# Altium PCB Connected_Cube.PcbDoc (part 4 of 4)
Units mil, origin at the board's own origin, x right, y up, seen from the top; angles counter-clockwise.
Board outline 4960.63 x 3700.79 mil, 4 copper layers (Top Layer, GND, Power, Bottom Layer), stack 47.164 mil thick; 209 components, 203 nets, 946 pads, 737 vias.
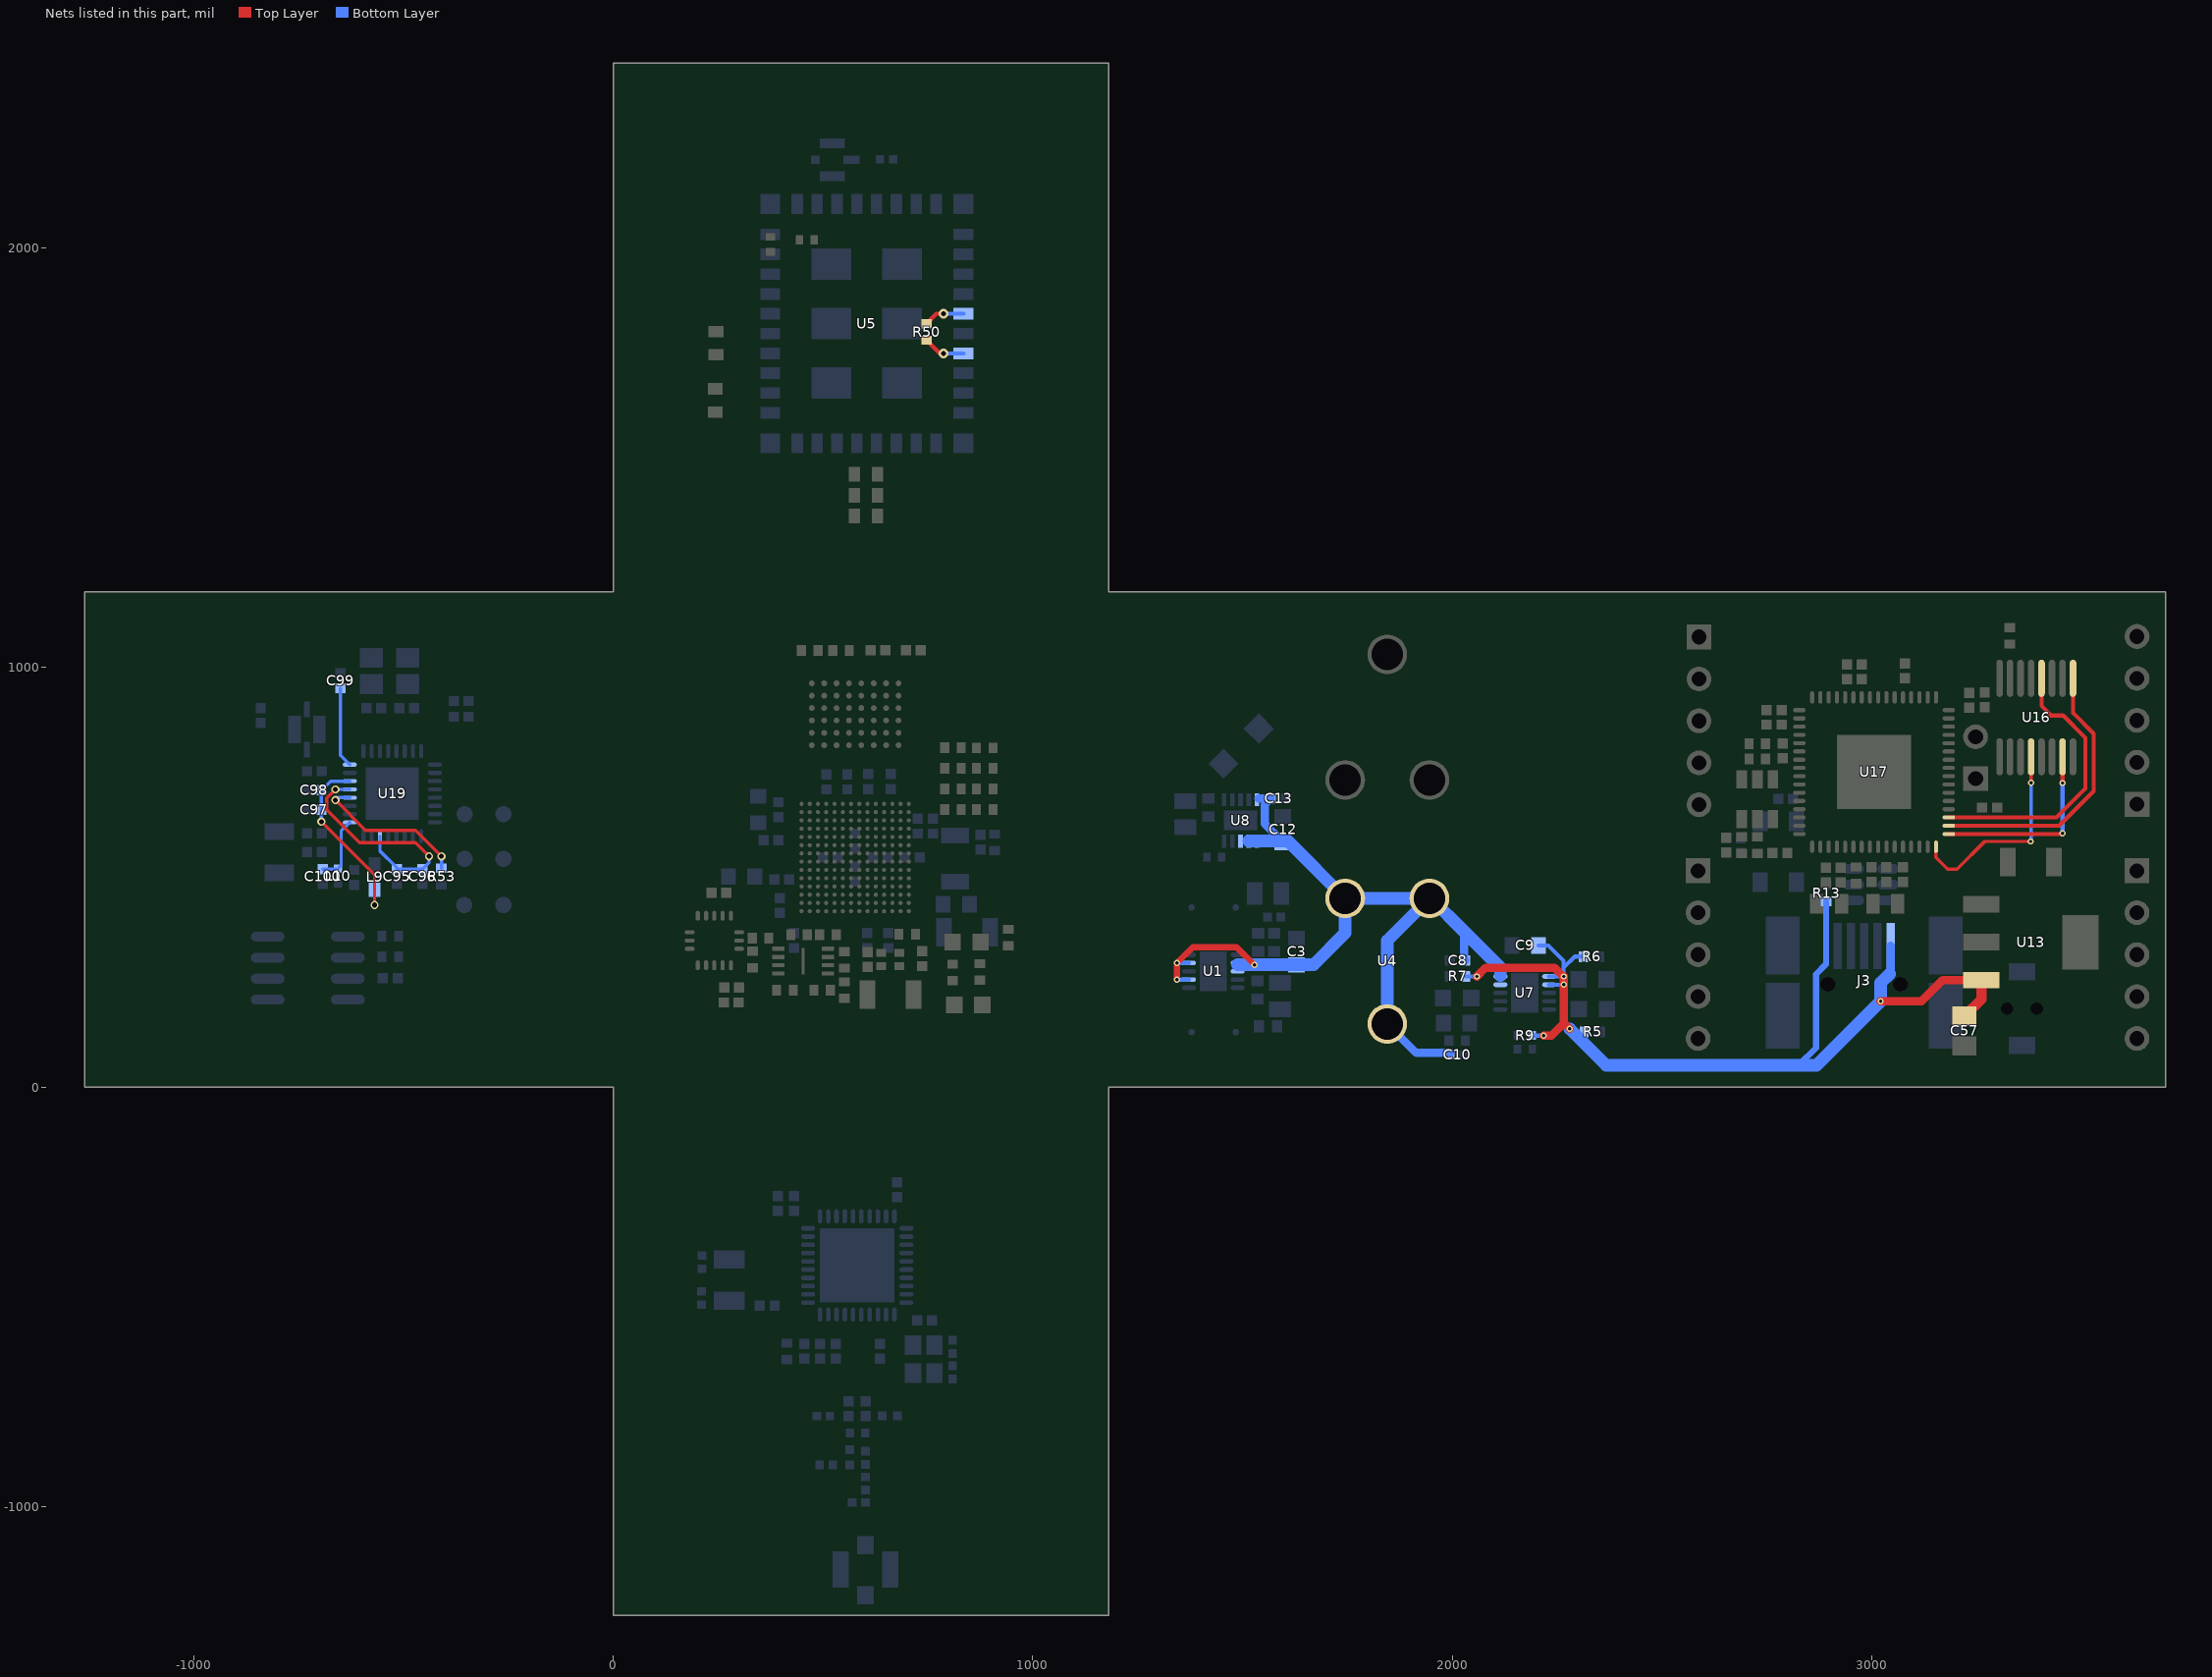
[diagram p6: the nets of this part, all layers, seen from the top]

## Via types
v1: diameter 15, hole 8, Top Layer to Bottom Layer, tented both sides, 313 vias
v2: diameter 19.68, hole 11.81, Top Layer to Bottom Layer, tented both sides, 269 vias
v3: diameter 11, hole 6, Top Layer to Bottom Layer, tented both sides, 78 vias
v4: diameter 23.62, hole 11.81, Top Layer to Bottom Layer, tented both sides, 37 vias
v5: diameter 19.68, hole 7.87, Top Layer to Bottom Layer, tented both sides, 35 vias
v6: diameter 15.75, hole 11.81, Top Layer to Bottom Layer, tented both sides, 5 vias

## Nets (pads, with @x,y where several pads share a name; then routed paths per layer and width w, separated by ;. In a path a pad name is that pad's centre, name@x,y a point inside that pad or via, vN(x,y) a via of type N, cw(c..) or ccw(c..) an arc to the next point about the centre after c; other vN are vias at no path point) (continued)
TCK: U16.4 U17.16 | length 492
  Top Layer w8: U17.16@3153.54,572.83 3153.54,547.24 3181.1,519.69 3203.74,519.69 3269.69,585.63 v1(3378.94,585.63) ; v1(3379.92,725.39) 3380.22,725.69 U16.4@3380.22,787.4
  Bottom Layer w8: v1(3378.94,585.63) 3379.92,586.61 v1(3379.92,725.39)
TDI: U16.7 U17.17 | length 451.3
  Top Layer w10: U17.17@3184.06,603.35 v1@3453.25,603.35 ; v1(3455.22,724.9) U16.7@3455.22,787.4
  Bottom Layer w10: v1(3455.22,605.32) v1(3455.22,724.9)
TDO: U16.9 U17.18 | length 668.8
  Top Layer w10: U17.18@3184.06,623.03 3446.85,623.03 3529.53,705.71 3529.53,842.52 3480.22,891.83 U16.9@3480.22,974.41
TMS: U16.12 U17.19 | length 677.4
  Top Layer w10: U17.19@3184.06,642.72 3440.95,642.72 3509.84,711.61 3509.84,832.68 3456.69,885.83 3427.85,885.83 3405.22,908.46 U16.12@3405.22,974.41
VBUS: C9.1 C57.2 J3.1 R5.2 R6.2 R7.2 R9.2 R13.1 U7.1 U7.2 U13.3 | length 2471.4
  Top Layer w20: v1(2059.06,263.78) 2079.72,284.45 2244.09,284.45 2264.76,263.78 v1(2265.75,263.78) 2265.75,153.54 ; v1(2218.5,123.03) 2237.2,123.03 2265.75,151.57 2265.75,153.54 ; v1(2280.51,138.78) 2265.75,153.54 ; v1(3021.65,204.72) 3119.09,204.72 3169.29,254.92 U13.3@3261.81,254.92
  Top Layer w25: C57.2@3221.46,169.29 3261.81,209.65 U13.3@3261.81,254.92
  Bottom Layer w10: R7.2@2032.48,263.78 v1(2059.06,263.78) ; R9.2@2190.95,123.03 v1(2218.5,123.03) ; C9.1@2205.71,337.6 2229.33,337.6 2265.75,301.18 2265.75,284.45 ; U7.2@2231.3,244.09 v1(2265.75,244.09) ; U7.1@2231.3,263.78 v1(2265.75,263.78) 2265.75,284.45 ; R6.2@2312.99,311.02 2292.32,311.02 2265.75,284.45
  Bottom Layer w15: 2825.79,52.17 2867.45,93.83 2867.45,269.03 2891.73,293.31 R13.1@2891.73,442.17
  Bottom Layer w20: 3045.27,269.84 J3.1@3045.27,336.61
  Bottom Layer w30: v1(2280.51,138.78) 2367.13,52.17 2825.79,52.17 2869.09,52.17 v1(3021.65,204.72) 3021.65,248.35 3043.15,269.84
VDD_BAT: C100.2 L10.2 U19.1 | length 158.9
  Bottom Layer w7.87: C100.2@-692.91,519.69 -657.48,519.69 L10.2@-656.5,520.67 -648.62,528.54 -648.62,610.24 U19.1@-627.95,630.91
VDD_CORE: C95.2 C96.2 U19.5 U19.30 | length 574.9
  Top Layer w7.87: v2(-662.4,709.65) -683.07,688.98 -683.07,661.42 -604.33,582.68 -471.46,582.68 v2(-438.98,550.2)
  Bottom Layer w7.87: v2(-662.4,709.65) U19.5@-627.95,709.65 ; U19.30@-556.1,598.42 -556.1,562.99 -515.75,522.64 C95.2@-515.75,519.69 C96.2@-454.72,519.69 -438.98,535.43 v2(-438.98,550.2)
VDD_REG_IN: C97.2 C98.2 L9.2 U19.6 | length 439.5
  Top Layer w7.87: v2(-695.87,632.87) -568.9,505.91 v2(-568.9,434.06)
  Bottom Layer w7.87: v2(-695.87,632.87) C97.2@-695.87,661.42 C98.2@-695.87,707.68 -674.21,729.33 U19.6@-627.95,729.33 ; v2(-568.9,434.06) L9.2@-568.9,470.47
VDD_XTAL: C99.2 U19.8 | length 191.5
  Bottom Layer w7.87: C99.2@-650.59,950.79 -650.59,791.34 U19.8@-627.95,768.7
VIN: C3.2 C8.1 C10.1 C12.2 C13.1 U1.2 U1.3 U1.7 U1.9 U4.1 U4.2 U4.3 U7.9 U7.10 U8.5 U8.6 U8.7 U8.8 | length 2211.9
  Top Layer w15: v1(1343.98,256.41) v1@1343.98,295.75 ; v1(1344.01,295.78) 1381.89,333.66 1486.22,333.66 v1(1528.54,291.34)
  Bottom Layer w10: v1(1343.98,256.41) U1.7@1372.56,256.41 ; v1(1344.01,295.78) U1.9@1372.56,295.78
  Bottom Layer w15: U8.6@1535.43,586.61 1574.8,586.61
  Bottom Layer w20: U8.5@1538.39,687.99 C13.1@1567.91,687.99 1553.15,673.23 1553.15,627.95 C12.2@1594.49,586.61 ; U4.3@1845.47,150.67 1914.6,81.54 C10.1@1996.06,81.54 ; 2028.54,371.06 2028.54,304.13 C8.1@2030.51,302.17
  Bottom Layer w30: U1.2@1488.7,291.96 1669.91,291.96 ; U8.7@1515.75,586.61 1594.49,586.61 1608.33,586.61 U4.1@1745.08,449.87 ; 1669.29,291.34 1669.91,291.96 ; U4.3@1845.47,150.67 1845.47,349.47 U4.2@1945.87,449.87 ; U7.10@2115.16,265.75 2115.16,284.45 2028.54,371.06 1949.74,449.87 U4.2@1945.87,449.87 ; 1669.91,291.96 1745.08,367.13 U4.1@1745.08,449.87 ; U4.1@1745.08,449.87 U4.2@1945.87,449.87
WAKE: R53.1 U19.4 | length 373.8
  Top Layer w7.87: v2(-662.4,684.06) -590.55,612.2 -471.46,612.2 v2(-409.45,550.2)
  Bottom Layer w7.87: v2(-662.4,684.06) -656.5,689.96 U19.4@-627.95,689.96 ; R53.1@-409.45,521.65 v2(-409.45,550.2)
WL_EN1: R50.2 U5.7 | length 100.6
  Top Layer w10: R50.2@747.05,1780.51 778.54,1749.02 v4(787.4,1749.02)
  Bottom Layer w10: v4(787.4,1749.02) U5.7@834.65,1749.02
WL_EN2: R50.1 U5.5 | length 97.4
  Top Layer w10: R50.1@747.05,1819.88 770.67,1843.5 v4(787.4,1843.5)
  Bottom Layer w10: v4(787.4,1843.5) U5.5@834.65,1843.5
pads on no net: J3.4 J3.X J3.Y SW5.MH1 SW5.MH2 U2.2 U2.3 U5.2 U5.3 U5.4 U5.24 U10.M12 U11.A6 U11.E3 U11.G2 U11.H1 U11.H6 U15.3 U15.4 U17.22 U17.23 U17.24 U17.26 U17.27 U17.28 U17.29 U17.30 U17.32 U17.33 U17.34 U17.36 U17.43 U17.44 U17.45 U17.46 U17.48 U17.52 U17.53 U17.54 U17.55 U17.57 U17.58 U17.59 U17.60 U19.11 U19.12 U19.13 U19.23 U19.24 U19.25 X2.4

## Polygon pours and split planes (outlines as drawn)
GND on GND "Power-No Net" (solid, pour order 40): 1263.78,1181.1 1263.78,0 2434.05,0 2434.05,1181.1 1263.78,1181.1
GND on GND "Power-No Net" (solid, pour order 47): 3.94,1174.21 3.94,3.94 1175.2,3.94 1175.2,1174.21 3.94,1174.21
GND on GND "Power-No Net" (solid, pour order 43): 2525.59,1181.1 2525.59,0 3700.79,0 3700.79,1181.1 2525.59,1181.1
GND on GND "Power-No Net" (solid, pour order 36): 0,-1259.84 1181.1,-1259.84 1181.1,-84.65 0,-84.65 0,-1259.84
GND on GND "GND" (solid, pour order 32): -933.07,1181.1 -84.65,1181.1 -84.65,0 -933.07,0 -933.07,1181.1
GND on GND "Power-No Net" (solid, pour order 28): 0,2440.95 1181.1,2440.95 1181.1,1263.78 0,1263.78 0,2440.95
GND on Power "Power-No Net" (solid, pour order 27): 0,2440.95 1181.1,2440.95 1181.1,1263.78 0,1263.78 0,2440.95
GND on Power "Power-No Net" (solid, pour order 35): 0,-1259.84 1181.1,-1259.84 1181.1,-84.65 0,-84.65 0,-1259.84
GND on Power "GND" (solid, pour order 31): -933.07,1181.1 -84.65,1181.1 -84.65,0 -933.07,0 -933.07,1181.1
3V3 on Power "Power-No Net" (solid, pour order 46): 3.94,1174.21 3.94,3.94 1175.2,3.94 1175.2,1174.21 3.94,1174.21
GND on Power "Power-No Net" (solid, pour order 39): 1263.78,1181.1 1263.78,0 2434.06,0 2434.06,1181.1 1263.78,1181.1
3V3_FT on Power "Power-No Net" (solid, pour order 48): 2525.59,1181.1 2525.59,0 3700.79,0 3700.79,1181.1 2525.59,1181.1
GND on Top Layer "Power-No Net" (solid, pour order 42): 2525.59,1181.1 2525.59,0 3700.79,0 3700.79,1181.1 2525.59,1181.1
GND on Top Layer "Power-No Net" (solid, pour order 38): 1263.78,1181.1 1263.78,0 2434.05,0 2434.05,1181.1 1263.78,1181.1
GND on Top Layer "Power-No Net" (solid, pour order 45): 3.94,1174.21 3.94,3.94 1175.2,3.94 1175.2,1174.21 3.94,1174.21
GND on Top Layer "Power-No Net" (solid, pour order 26): 0,2440.95 1181.1,2440.95 1181.1,1263.78 0,1263.78 0,2440.95
GND on Top Layer "Power-No Net" (solid, pour order 34): 0,-1259.84 1181.1,-1259.84 1181.1,-84.65 0,-84.65 0,-1259.84
GND on Top Layer "GND" (solid, pour order 30): -933.07,1181.1 -84.65,1181.1 -84.65,0 -933.07,0 -933.07,1181.1
GND on Bottom Layer "Power-No Net" (solid, pour order 41): 2525.59,1181.1 2525.59,0 3700.79,0 3700.79,1181.1 2525.59,1181.1
GND on Bottom Layer "Power-No Net" (solid, pour order 37): 1263.78,1181.1 1263.78,0 2434.05,0 2434.05,1181.1 1263.78,1181.1
GND on Bottom Layer "Power-No Net" (solid, pour order 44): 3.94,1174.21 3.94,3.94 1175.2,3.94 1175.2,1174.21 3.94,1174.21
GND on Bottom Layer "Power-No Net" (solid, pour order 25): 0,2440.95 1181.1,2440.95 1181.1,1263.78 0,1263.78 0,2440.95
GND on Bottom Layer "Power-No Net" (solid, pour order 33): 0,-1259.84 1181.1,-1259.84 1181.1,-84.65 0,-84.65 0,-1259.84
GND on Bottom Layer "GND" (solid, pour order 29): -933.07,1181.1 -84.65,1181.1 -84.65,0 -933.07,0 -933.07,1181.1

## Other copper
Power:
  region net GND: 119.09,1307.09 119.09,1140.75 219.49,1140.75 219.49,1307.09
  region net GND: 45.28,634.84 -121.06,634.84 -121.06,534.45 45.28,534.45
  region net GND: 219.49,-124.02 219.49,42.32 118.11,42.32 118.11,-124.02
  rectangle net GND: 1137.8,217.52 1304.13,317.91
  rectangle net GND: 2390.75,553.15 2557.09,653.54
Bottom Layer:
  rectangle net GND: 2140.75,144.68 2205.71,312.01
  region net GND: 219.49,1139.76 219.49,1306.1 119.09,1306.1 119.09,1139.76
  region net GND: 218.5,-124.02 218.5,42.32 118.11,42.32 118.11,-124.02
  rectangle net GND: -122.05,534.45 44.29,634.84
  rectangle net GND: 1136.81,217.52 1303.15,317.91
  rectangle net GND: 2390.75,553.15 2557.09,653.54
  region net 1V8: 1624.02,267.72 1520.67,267.72 1520.67,239.17 1624.02,239.17
  region net 1V2: 1567.91,490.16 1504.92,490.16 1504.92,391.73 1567.91,391.73
  rectangle net 3V3: 1337.6,666.34 1462.6,702.76
  rectangle net VIN: 1528.54,669.29 1581.69,702.76
  rectangle net VBUS: 2265.75,112.2 2325.78,153.54
  rectangle net VIN: 1489.17,569.88 1542.32,603.35
  rectangle net VIN: 1471.46,268.7 1505.91,306.1
  rectangle net VBUS: 2214.57,236.22 2275.59,274.61
  rectangle net VIN: 2098.43,236.22 2132.87,274.61
  rectangle net 3V3: 1124.02,571.85 1158.46,615.16
  pour cut-out: -778.54,647.64 -714.57,647.64 -714.57,720.47 -778.54,720.47

## Silkscreen, mask and mechanical layers (free items; w line width, h text height)
Top Overlay:
  text "-" at 2322.83,779.53 h30
  text "+" at 2322.83,326.77 h30
Bottom Overlay:
  text "OE" at 3177.17,822.83 h30
  text "3V3" at 3178.15,726.38 h30
  text "Reset" at 3397.64,321.85 h30
Mechanical 13:
  lines w10: -78.74,0 -78.74,1181.1 ; 0,-78.74 1181.1,-78.74 ; 0,1259.84 1181.1,1259.84 ; 1259.84,0 1259.84,1181.1 ; 2519.68,0 2519.68,1181.1 ; 2440.95,0 2440.95,1181.1 ; 2440.95,0 1181.1,0 1181.1,-1259.84 0,-1259.84 0,0 -1259.84,0 -1259.84,1181.1 0,1181.1 0,2440.95 1181.1,2440.95 1181.1,1181.1 2440.95,1181.1 ; 2440.95,0 3700.79,0 3700.79,1181.1 2440.95,1181.1

## Text inside footprints (layer, text, board x,y; h text height)
J2: Bottom Overlay "IO5" at 2708.66,668.31 h30; Bottom Overlay "IO4" at 2709.38,753 h30; Bottom Overlay "IO2" at 2708.66,952.78 h30; Bottom Overlay "IO3" at 2708.66,852.78 h30; Bottom Overlay "IO1" at 2702.23,1055.12 h30
J6: Bottom Overlay "IO10" at 2725.39,99.41 h30; Bottom Overlay "IO9" at 2705.81,195.75 h30; Bottom Overlay "IO7" at 2706.52,391.73 h30; Bottom Overlay "IO8" at 2706.52,295.53 h30; Bottom Overlay "IO6" at 2705.81,500.98 h30
J7: Bottom Overlay "H_TCK" at 3570.87,660.43 h30; Bottom Overlay "H_TMS" at 3571.65,863.19 h30; Bottom Overlay "H_TDI" at 3572.83,764.76 h30; Bottom Overlay "H_TCK" at 3570.87,962.6 h30; Bottom Overlay "GND" at 3563.98,1062.01 h30
J8: Bottom Overlay "S_TCK" at 3566.14,504.92 h30; Bottom Overlay "S_TDO" at 3566,306.1 h30; Bottom Overlay "S_TDI" at 3566.93,402.56 h30; Bottom Overlay "S_TMS" at 3566.93,204.72 h30; Bottom Overlay "GND" at 3566.93,110.24 h30